# Altium PCB BatteryIot.PcbDoc (part 1 of 3)
Units mm, origin at the board's own origin, x right, y up, seen from the top; angles counter-clockwise.
Board outline 114 x 84 mm, 2 copper layers (Top Layer, Bottom Layer); 162 components, 97 nets, 548 pads, 135 vias.
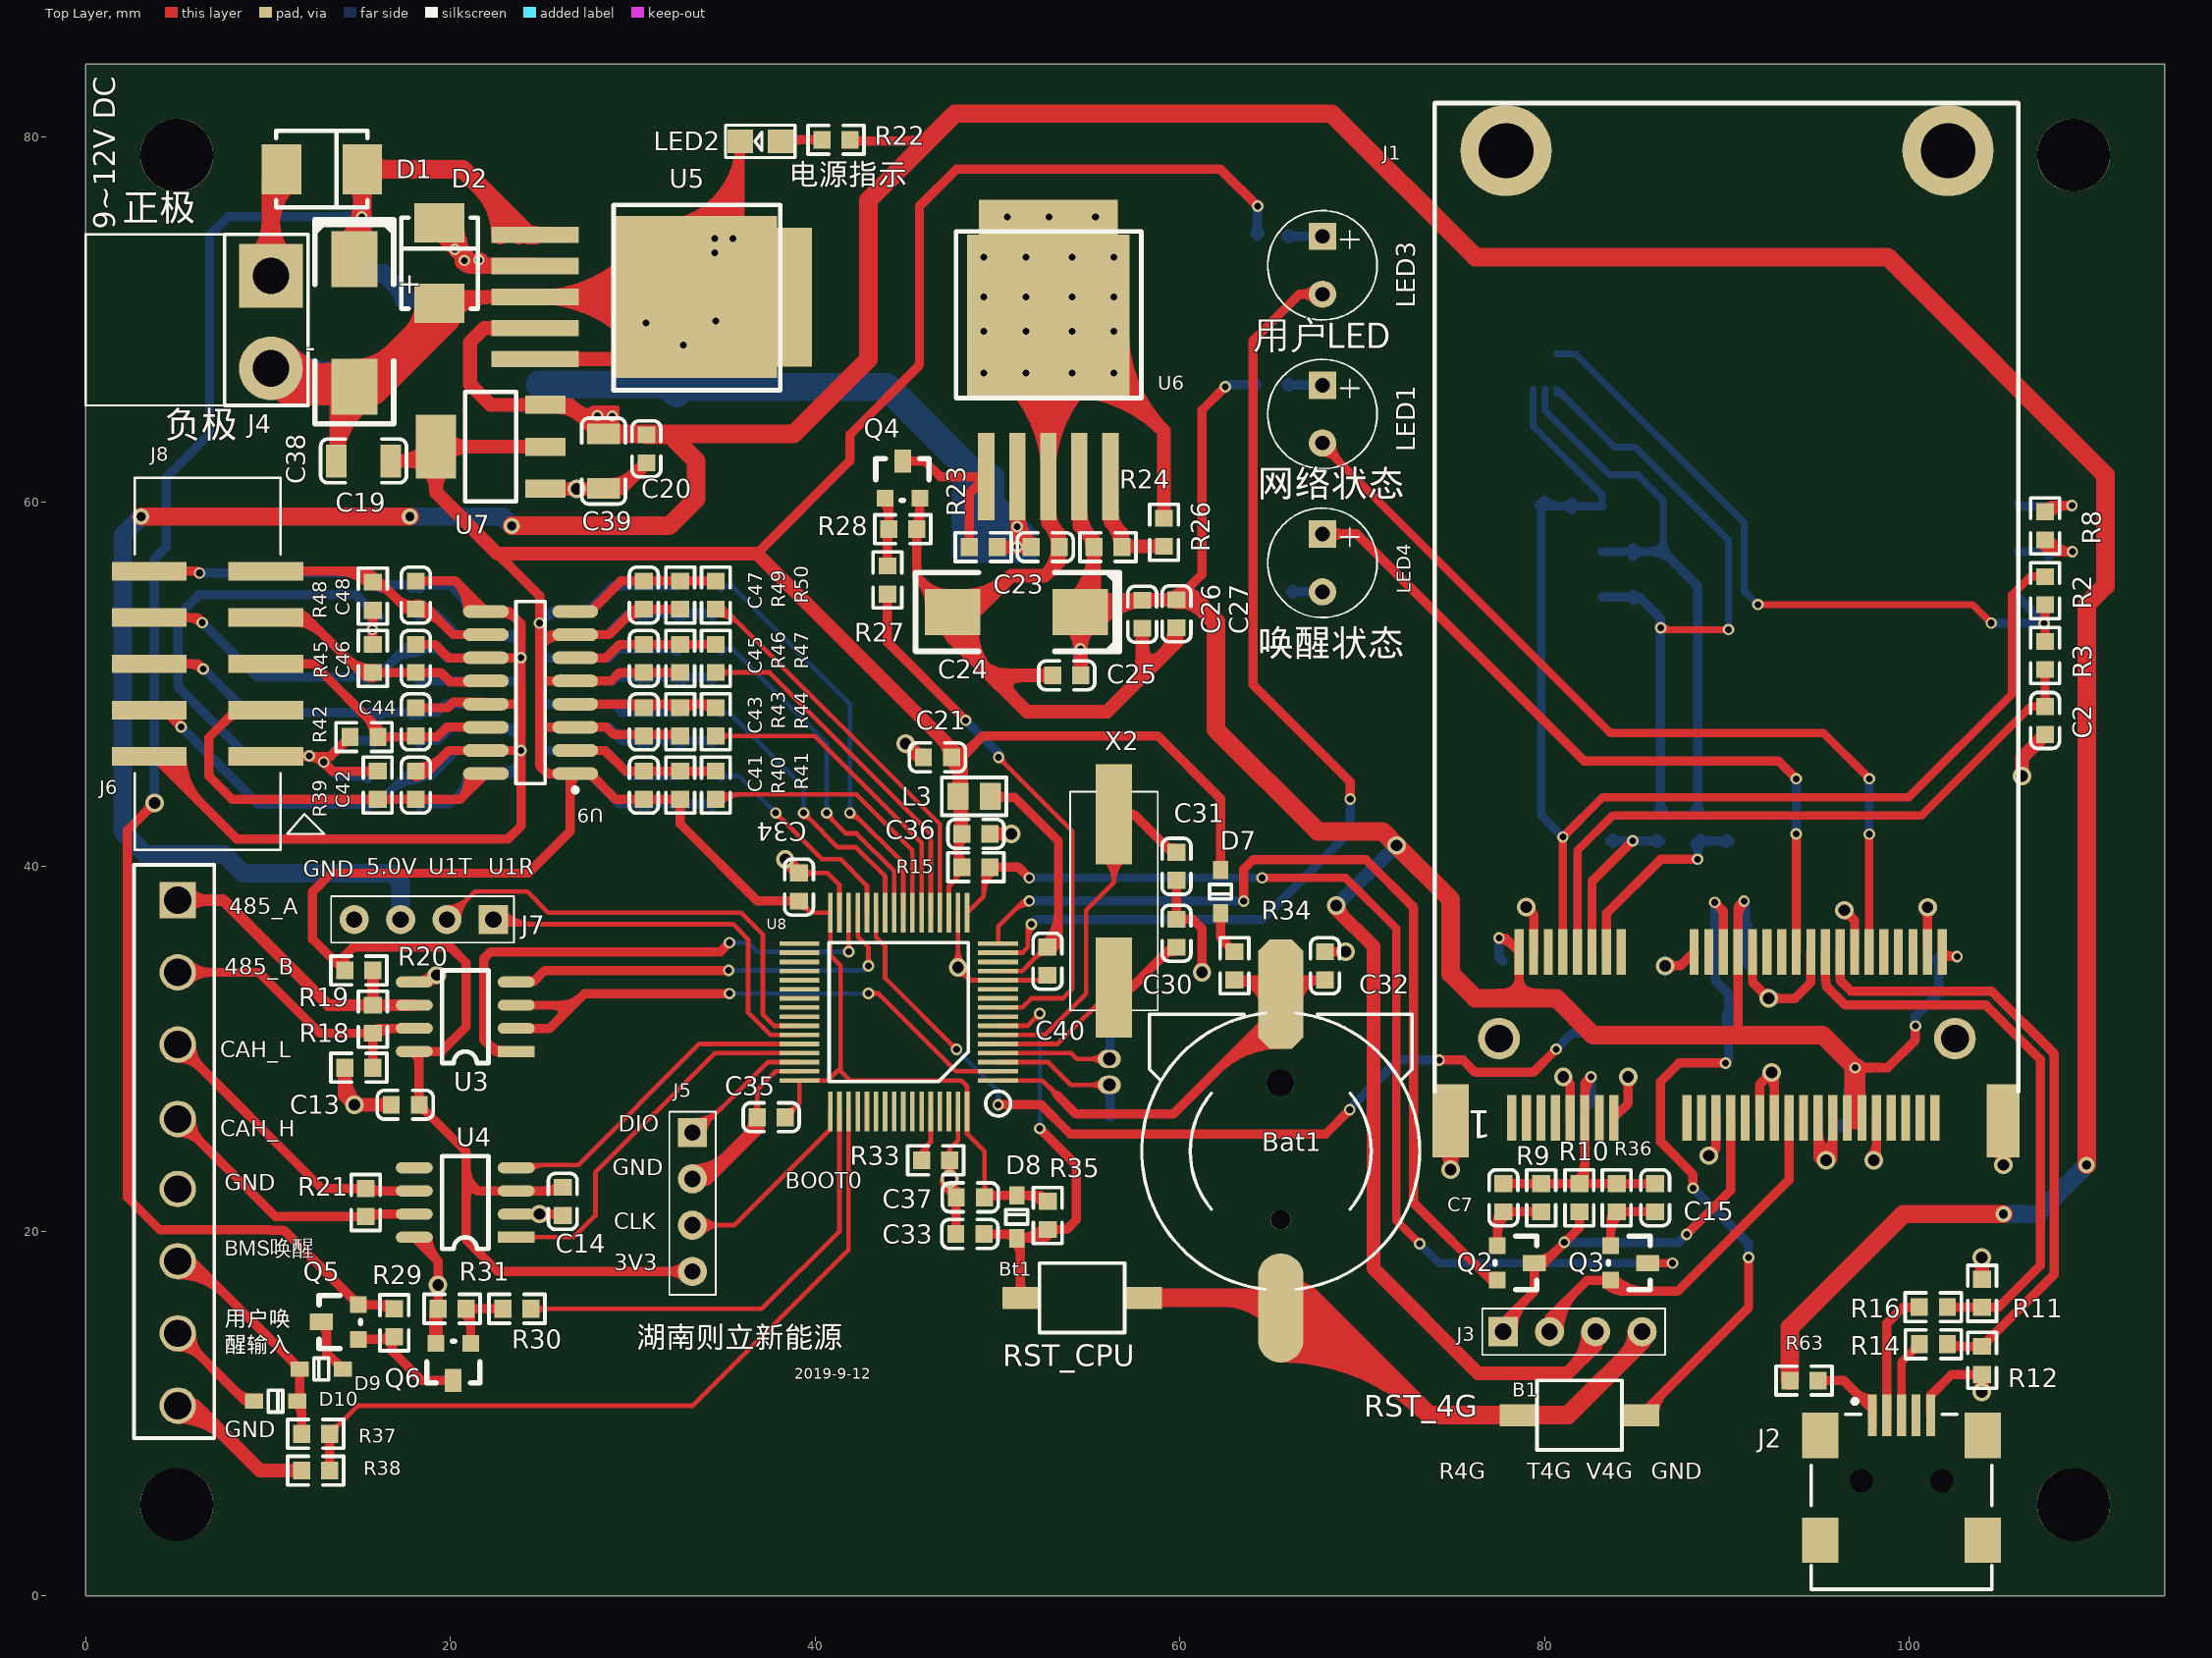
[diagram p0: Top Layer view]
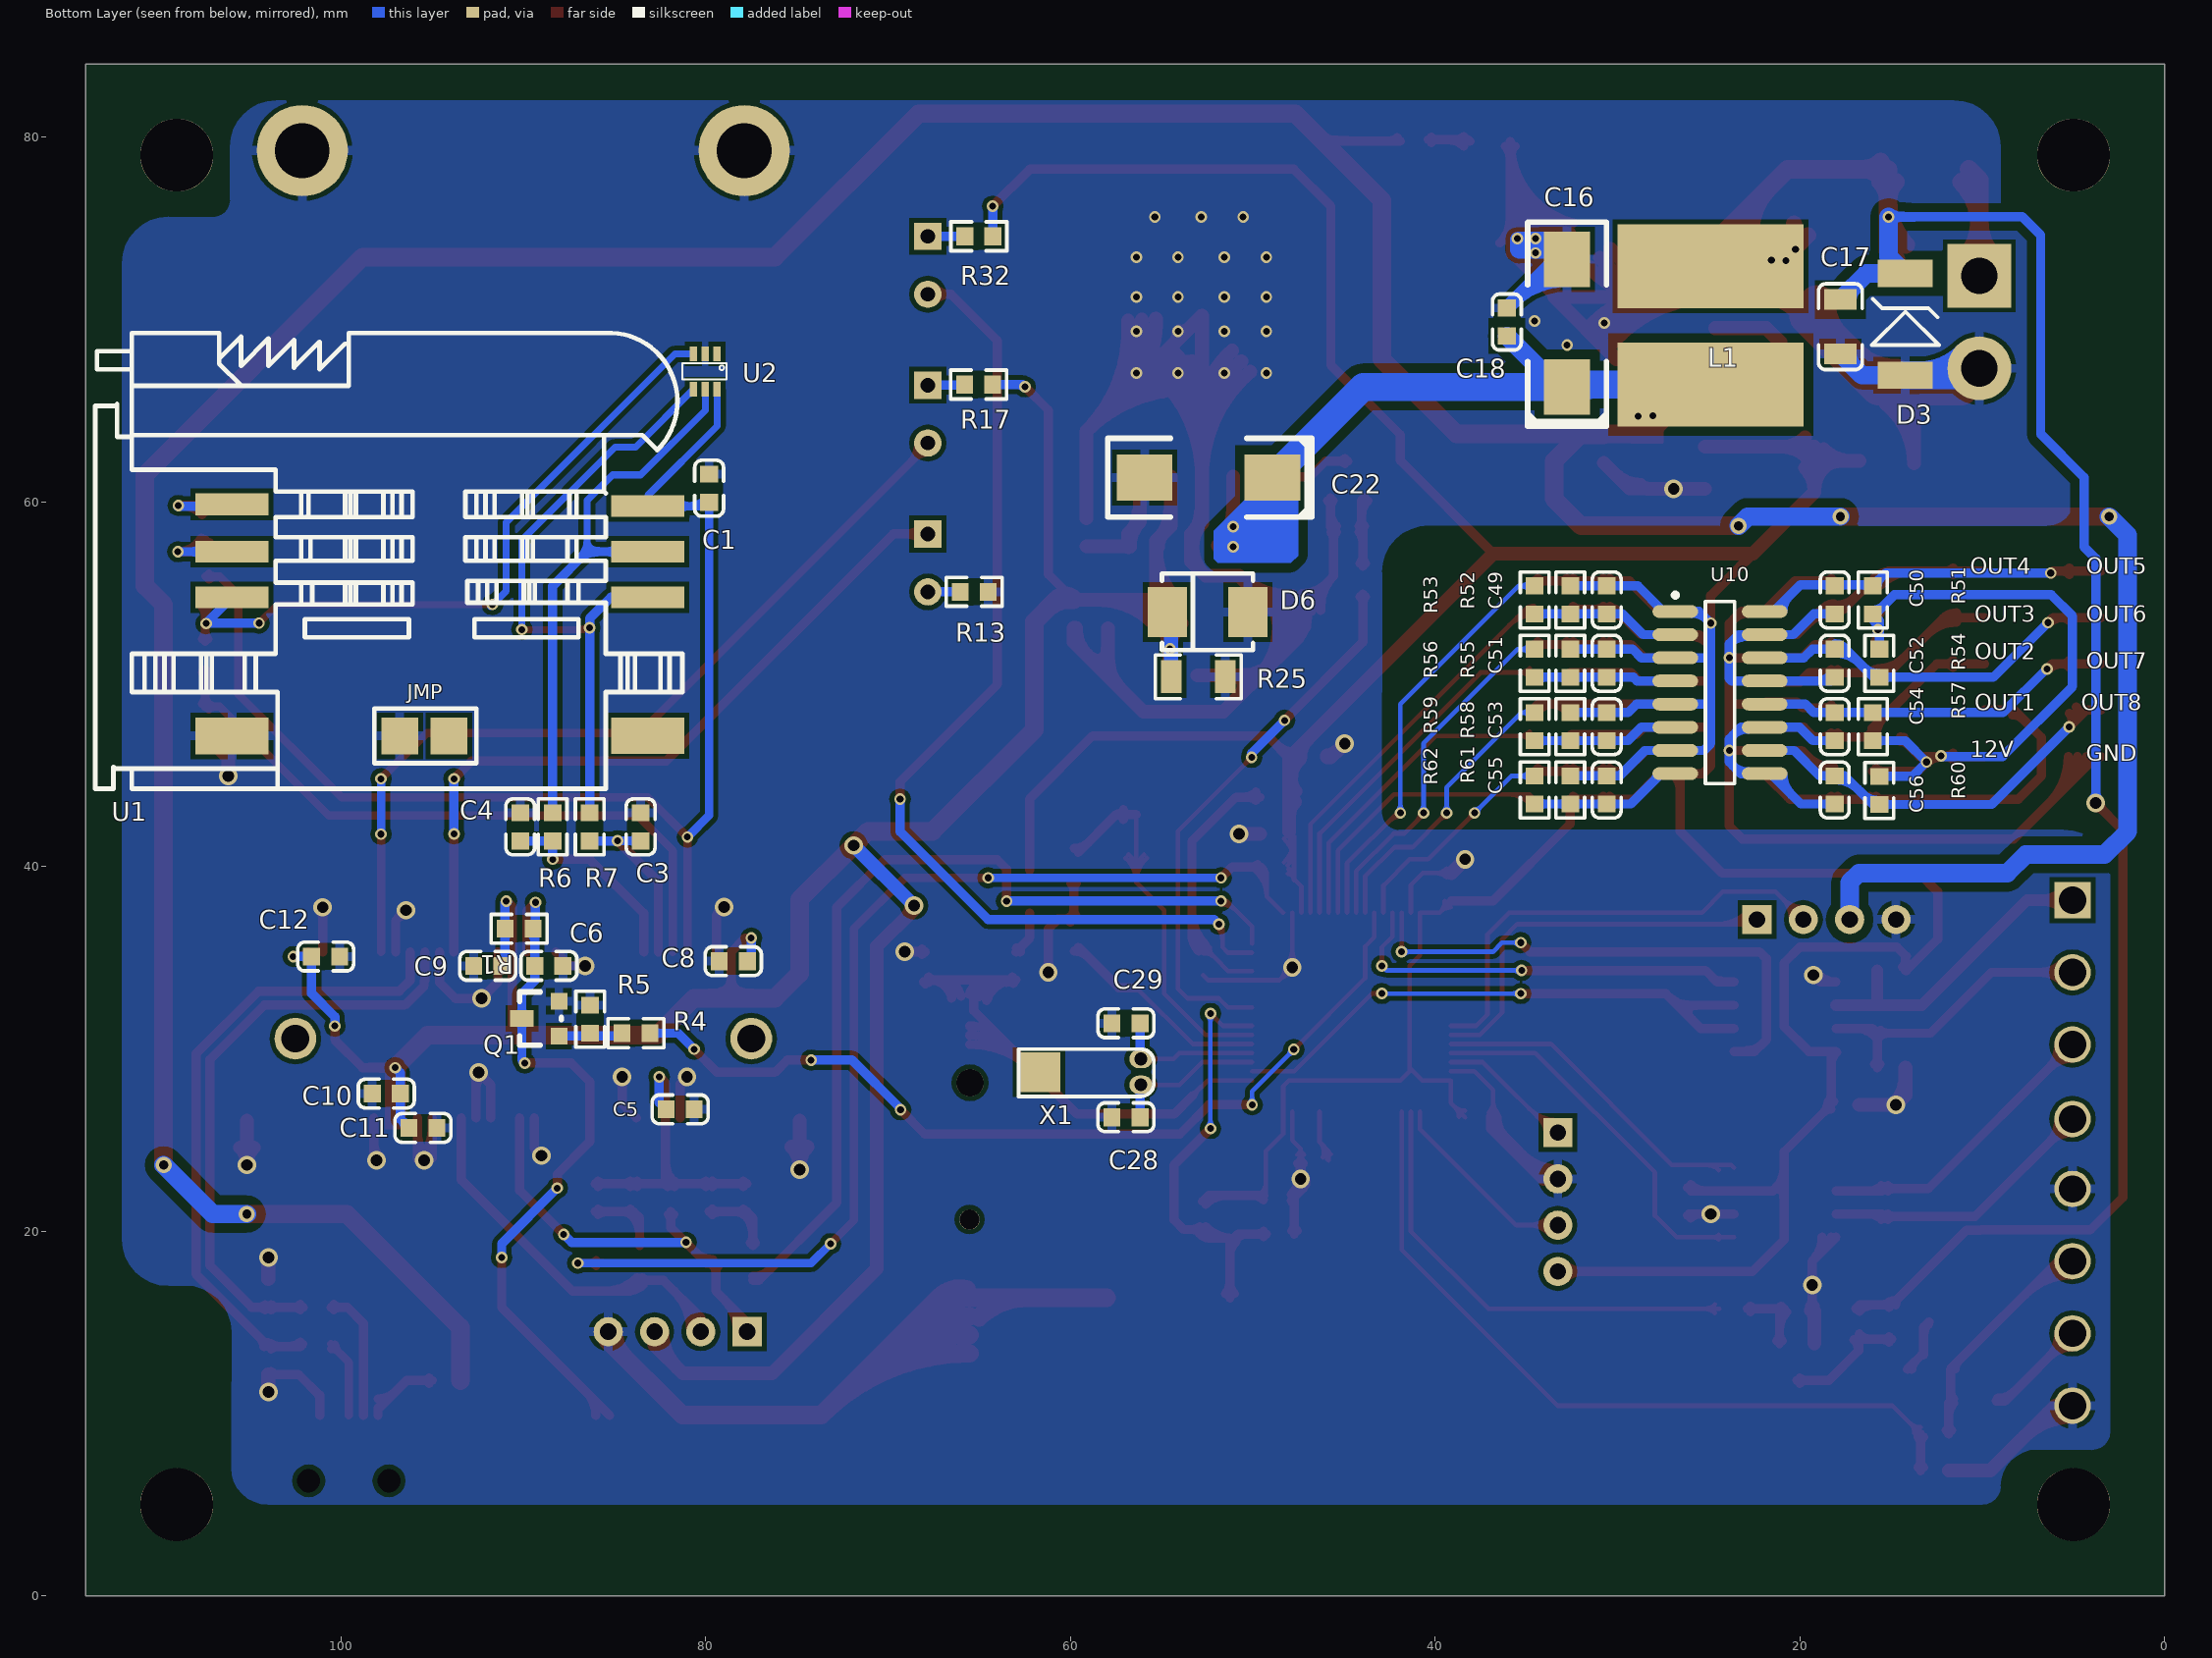
[diagram p1: Bottom Layer view, seen from below]
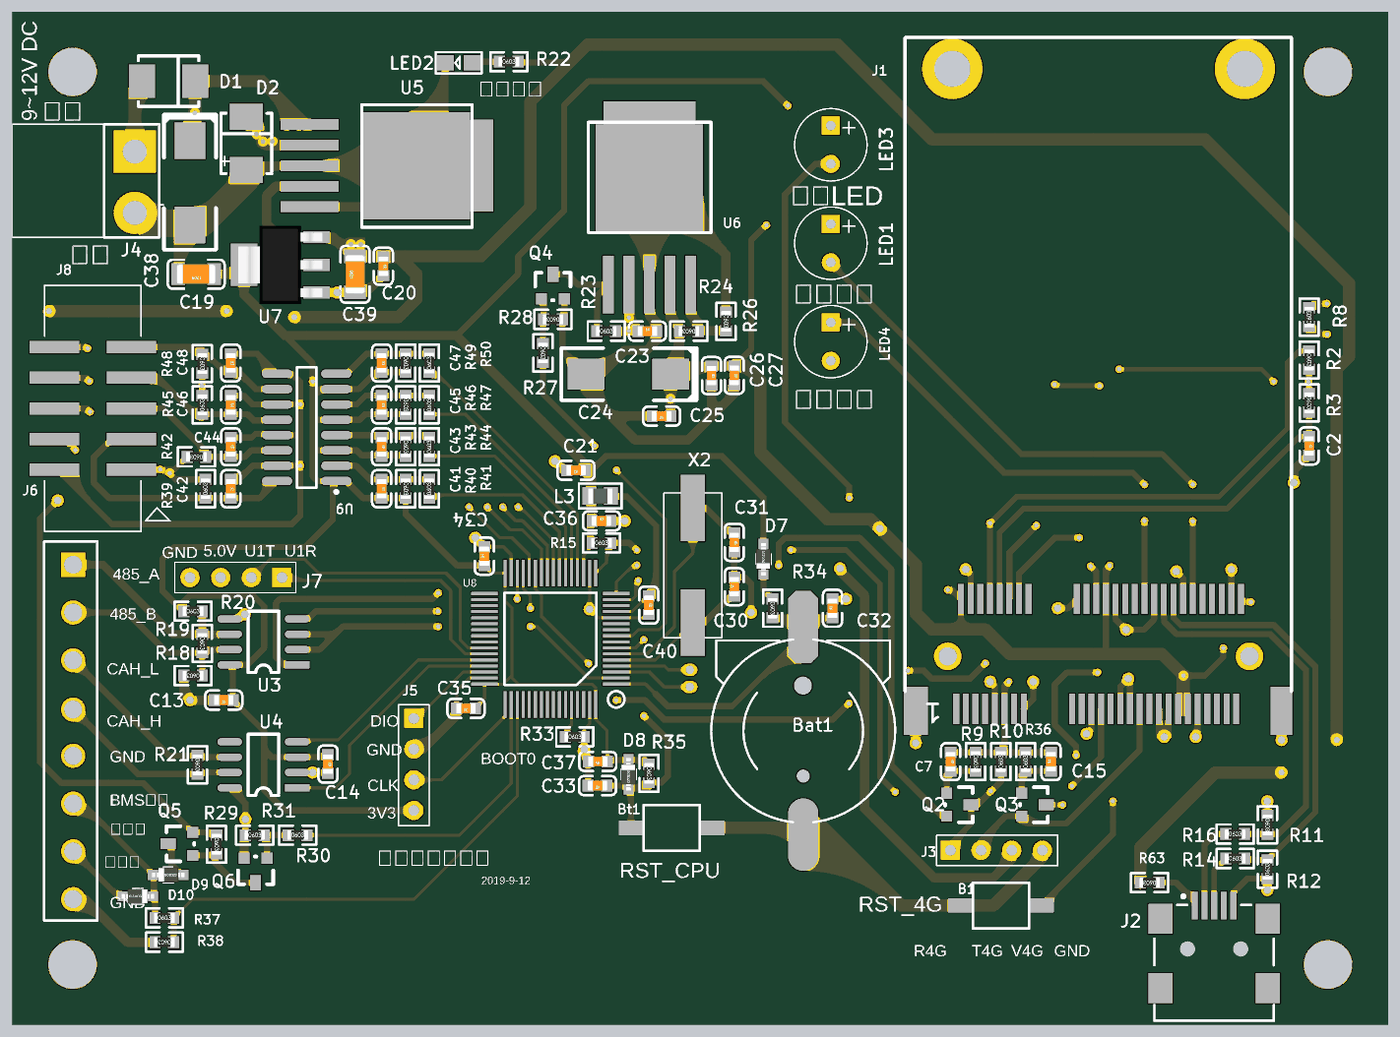
[diagram p4: 3D render of the assembled board from above, using the file's embedded part models]
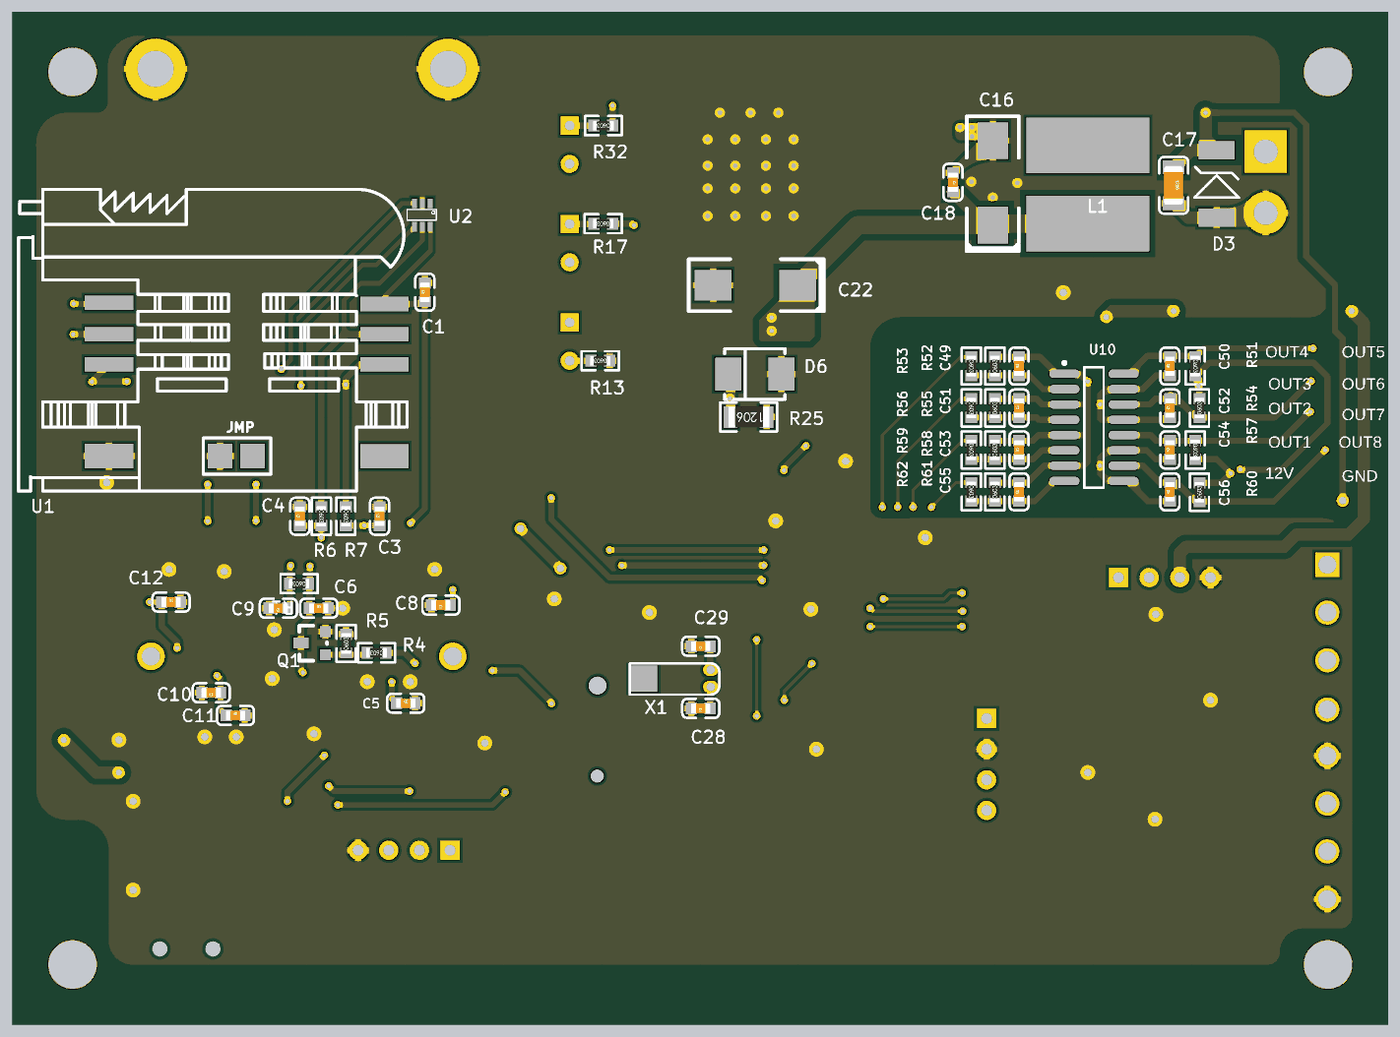
[diagram p5: 3D render of the assembled board from below, using the file's embedded part models]

## Layer stack, top to bottom
Top Solder: solder mask 0.0102, Solder Resist, Dk 3.5
Top Layer: signal copper 0.0356
Dielectric 1: dielectric 0.32, FR-4, Dk 4.8
Bottom Layer: signal copper 0.0356
Bottom Solder: solder mask 0.0102, Solder Resist, Dk 3.5

## Board outline
0,0 0,84 114,84 114,0

## Design rules (kind name [scope] priority, off if disabled: settings)
Clearance Clearance_2 [InNamedPolygon('GND') vs InNetClass('PW_IN')] p1: gap=0.508
Clearance Clearance_1 [InNet('12V') or InNet('5.0V') vs InPoly] p2: gap=0.508
Clearance [All] p3: gap=0.254
DiffPairsRouting [All] p1: maxlimit=0.254 minlimit=0.254 mostfreqgap=0.254 toplayer_minwidth=0.381 toplayer_maxwidth=0.635 toplayer_prefwidth=0.508 bottomlayer_minwidth=0.381 bottomlayer_maxwidth=0.635 bottomlayer_prefwidth=0.508 maxuncoupledlength=12.7
HoleSize [All] p1: absolutevalues=TRUE maxlimit=25.4 minlimit=0.025 maxpercent=80.000 minpercent=20.000
PolygonConnect PolygonConnect_1 [IsVia vs IsPolygon] p1: connectstyle=Direct reliefconductorwidth=0.254 reliefentries=4 polygonreliefangle="90 Angle" airgapwidth=0.254
PolygonConnect [All] p2: connectstyle=Relief reliefconductorwidth=0.508 reliefentries=4 polygonreliefangle="90 Angle" airgapwidth=0.254
RoutingVias [All] p1: holewidth=0.711 width=1.27 viastyle="Through Hole" minholewidth=0.711 minwidth=1.27 maxholewidth=0.711 maxwidth=1.27
SolderMaskExpansion [All] p1: expansion=0.102
Width [All] p1: maxlimit=20.32 minlimit=0.254 preferedwidth=0.508
27 further rules are at their usual default settings.

## Classes and differential pairs
component class PWR: C16 C17 C18 C19 C20 C21 C22 C23 C24 C25 C26 C27 C38 C39 C40 D1 D2 D3 D6 J4 L1 L3 LED2 Q4 R22 R23 R24 R25 R26 R27 R28 U5 U6 U7
component class GPIO: C41 C42 C43 C44 C45 C46 C47 C49 C50 C51 C52 C53 C54 C55 C56 D9 D10 J8 LED3 Q5 Q6 R29 R30 R31 R32 R37 R38 R39 R40 R41 R42 R43 R44 R45 R46 R47 R48 R49 R50 R51 R52 R53 R54 R55 R56 R57 R58 R59 R60 R61 R62 U9 U10
component class EC20: B1 C1 C2 C3 C4 C6 C8 C9 C10 C11 C12 J1 J2 J3 LED1 LED4 Q1 R1 R2 R3 R4 R5 R6 R7 R8 R11 R12 R13 R14 R16 R17 R63 U1 U2
component class COMM: C13 C14 R18 R19 R20 R21 U3 U4
component class TopLevelMCU: Bat1 Bt1 C28 C29 C30 C31 C32 C33 C34 C35 C36 C37 D7 D8 J5 J6 J7 R33 R34 R35 U8 X1 X2
differential pair RS: +RS_P -RS_N
differential pair CAN: +CAN_P -CAN_N
differential pair USB: +USB_P -USB_N

## Components (designator, comment, footprint, x,y, rotation, side; value= is the part's Value field where it differs from the comment)
B1 "Reset" "3*6*2.5贴片 微动开关" 81.908,9.899 r180 top
Bat1 "3v Battery" BATM 65.532,24.376 r180 top
Bt1 "Reset" "3*6*2.5贴片 微动开关" 54.635,16.332 r180 top
C1 "104" 0603_C 79.812,60.734 r90 bottom
C2 "33pF" 0603_C 107.442,47.998 r270 top
C3 "33pF" 0603_C 83.566,42.164 r90 bottom
C4 "33pF" 0603_C 90.17,42.164 r90 bottom
C5 "100nF" 0603_C 81.4,26.67 r180 bottom
C6 "104" 0603_C 88.6,34.544 r180 bottom
C7 "1nF" 0603_C 77.744,21.825 r270 top
C8 "104" 0603_C 78.486,34.798 r0 bottom
C9 "104" 0603_C 91.948,34.544 r0 bottom
C10 "104" 0603_C 97.513,27.536 r0 bottom
C11 "104" 0603_C 95.504,25.654 r180 bottom
C12 "104" 0603_C 100.838,35.052 r180 bottom
C13 "104" 0603_C 17.526,26.924 r180 top
C14 "104" 0603_C 26.162,21.623 r270 top
C15 "1nF" 0603_C 86.062,21.825 r90 top
C16 "220uF/10V" SMD-CT-7343 32.766,66.294 r90 bottom
C17 "104" 1206_C 17.78,69.596 r270 bottom
C18 "104" 0603_C 36.068,69.85 r270 bottom
C19 "10uF" 1206_C 15.24,62.23 r180 top
C20 "104" 0603_C 30.748,62.893 r270 top
C21 "104" 0603_C 46.711,45.974 r180 top
C22 "470uF/10V" SMD-CT-7343 48.927,61.317 r0 bottom
C23 "104" 0603_C 52.621,57.506 r0 top
C24 "470uF/10V" SMD-CT-7343 54.54,53.951 r180 top
C25 "104" 0603_C 53.797,50.47 r180 top
C26 "33pF" 0603_C 57.937,53.823 r270 top
C27 "10pF" 0603_C 59.817,53.848 r270 top
C28 "22p" 0603_C 56.956,26.238 r0 bottom
C29 "22p" 0603_C 56.956,31.394 r0 bottom
C30 "22p" 0603_C 59.817,36.33 r90 top
C31 "22p" 0603_C 59.817,39.997 r270 top
C32 "104" 0603_C 67.957,34.544 r90 top
C33 "104" 0603_C 48.489,19.837 r180 top
C34 "104" 0603_C 39.116,38.862 r90 top
C35 "104" 0603_C 37.592,26.238 r180 top
C36 "104" 0603_C 48.819,41.781 r0 top
C37 "104" 0603_C 48.514,21.844 r180 top
C38 "470u/25V" SMD-CT-7343 14.732,73.301 r270 top
C39 "10uF" 1206_C 28.403,62.224 r90 top
C40 "104" 0603_C 52.738,34.798 r270 top
C41 "100nF 10% 50V" 0603_C 30.607,44.45 r270 top
C42 "100nF 10% 50V" 0603_C 18.108,44.45 r270 top
C43 "100nF 10% 50V" 0603_C 30.607,47.924 r270 top
C44 "100nF 10% 50V" 0603_C 18.108,47.924 r270 top
C45 "100nF 10% 50V" 0603_C 30.607,51.398 r270 top
C46 "100nF 10% 50V" 0603_C 18.108,51.398 r270 top
C47 "100nF 10% 50V" 0603_C 30.607,54.872 r270 top
C48 "100nF 10% 50V" 0603_C 18.108,54.872 r270 top
C49 "100nF 10% 50V" 0603_C 30.593,54.61 r90 bottom
C50 "100nF 10% 50V" 0603_C 18.094,54.61 r90 bottom
C51 "100nF 10% 50V" 0603_C 30.593,51.136 r90 bottom
C52 "100nF 10% 50V" 0603_C 18.094,51.136 r90 bottom
C53 "100nF 10% 50V" 0603_C 30.593,47.662 r90 bottom
C54 "100nF 10% 50V" 0603_C 18.094,47.662 r90 bottom
C55 "100nF 10% 50V" 0603_C 30.593,44.188 r90 bottom
C56 "100nF 10% 50V" 0603_C 18.094,44.188 r90 bottom
D1 "SS34" SMB(DO-214AA)_S1 12.954,78.232 r180 top
D2 "SS34" SMB(DO-214AA)_S1 19.406,73.076 r270 top
D3 "M7" SMBJ 14.224,69.596 r90 bottom
D6 "SMBJ5.0A" SMB(DO-214AA)_S1 52.483,53.951 r180 bottom
D7 "1N4148" SOD-323 62.23,38.608 r90 top
D8 "1N4148" SOD-323 51.054,20.777 r270 top
D9 "1N4148" SOD-323 12.925,12.432 r0 top
D10 "1N4148" SOD-323 10.414,10.668 r180 top
J1 "MINI-PCIE-CON" EC20_MINIPCI 90,52.652 r0 top locked
J2 "Debug 4G" USB_MINI_NEW 101.882,6.212 r0 top
J3 "CON4" CON4(2.54) 77.724,14.478 r90 top
J4 "CON2" CON5.08-2P 10.16,72.39 r0 top
J5 "CON4" CON4(2.54) 33.274,25.4 r0 top
J6 "CON8" CON8-3.96mm 5.055,24.286 r0 top
J7 "CON4" CON4(2.54) 22.352,37.084 r270 top
J8 "CON10" XH2.54-SMD-5*2P 6.687,51.105 r90 top locked
L1 "33uH" "CD105-33uH 2A" 24.892,72.898 r180 bottom
L3 "10nH" 0805_L 48.717,43.84 r0 top
LED1 "NET" LED 67.818,64.802 r270 top
LED2 "5VPWR" SMDLED 38.1,79.756 r180 top
LED3 "5VPWR" LED 67.818,72.962 r270 top
LED4 "WAKE" LED 67.818,56.642 r270 top
Q1 "S8050" SOT-23 88.872,31.611 r90 bottom
Q2 "S8050" SOT-23 78.237,18.288 r270 top
Q3 "S8050" SOT-23 84.447,18.288 r270 top
Q4 "2N5551" SOT-23 44.754,61.017 r0 top
Q5 "AO3401A P道沟 X13A15 SOT-23" SOT-23 14.133,14.972 r90 top
Q6 "2N5551" SOT-23 20.202,13.005 r180 top
R1 "1K" 0603_R 90.23,36.576 r0 bottom
R2 "10K" 0603_R 107.442,55.118 r270 top
R3 "22R" 0603_R 107.442,51.562 r270 top
R4 "4.7K" 0603_R 83.82,30.849 r0 bottom
R5 "47K" 0603_R 86.332,31.619 r90 bottom
R6 "22R" 0603_R 88.392,42.164 r270 bottom
R7 "22R" 0603_R 86.36,42.164 r270 bottom
R8 "0R" 0603_R 107.442,58.674 r90 top
R9 "4.7k" 0603_R 79.812,21.825 r270 top
R10 "10k" 0603_R 81.908,21.825 r90 top
R11 "15K" 0603_R 103.986,16.586 r270 top
R12 "15K" 0603_R 103.986,12.903 r90 top
R13 "1k" 0603_R 65.278,55.054 r0 bottom
R14 "22R" 0603_R 101.319,13.792 r0 top
R15 "10k" 0603_R 48.819,39.954 r0 top
R16 "22R" 0603_R 101.311,15.824 r0 top
R17 "1k" 0603_R 65.032,66.421 r0 bottom
R18 "360R" 0603_R 14.986,28.956 r180 top
R19 "120R" 0603_R 15.748,31.619 r270 top
R20 "360R" 0603_R 14.986,34.29 r0 top
R21 "120R" 0603_R 15.356,21.563 r270 top
R22 "4.7K" 0603_R 41.148,79.846 r0 top
R23 "51K" 0603_R 49.217,57.506 r0 top
R24 "82K" 0603_R 56.058,57.506 r180 top
R25 "470R" 1206_R 52.991,50.395 r0 bottom
R26 "47K" 0603_R 59.131,58.318 r270 top
R27 "4.7K" 0603_R 43.967,55.702 r270 top
R28 "47K" 0603_R 44.803,58.485 r180 top
R29 "5.1K" 0603_R 16.927,14.972 r270 top
R30 "4.7K" 0603_R 23.65,15.734 r0 top
R31 "47K" 0603_R 20.094,15.734 r0 top
R32 "1k" 0603_R 65.024,74.549 r0 bottom
R33 "10K" 0603_R 46.608,23.876 r0 top
R34 "1K" 0603_R 62.992,34.544 r270 top
R35 "10K" 0603_R 52.756,20.853 r270 top
R36 "4.7k" 0603_R 83.954,21.825 r90 top
R37 "8k" 0603_R 12.609,8.876 r0 top
R38 "3.3k" 0603_R 12.609,6.858 r180 top
R39 "3.3KΩ  ±5%" 0603_R 16.016,44.45 r90 top
R40 "2KΩ ±5%" 0603_R 32.604,44.45 r270 top
R41 "700Ω ±10%" 0603_R 34.558,44.45 r90 top
R42 "3.3KΩ  ±5%" 0603_R 15.265,47.092 r180 top
R43 "2KΩ ±5%" 0603_R 32.604,47.924 r270 top
R44 "700Ω ±10%" 0603_R 34.558,47.924 r90 top
R45 "3.3KΩ  ±5%" 0603_R 15.748,51.398 r90 top
R46 "2KΩ ±5%" 0603_R 32.604,51.398 r270 top
R47 "700Ω ±10%" 0603_R 34.558,51.398 r90 top
R48 "3.3KΩ  ±5%" 0603_R 15.748,54.813 r270 top
R49 "2KΩ ±5%" 0603_R 32.604,54.872 r270 top
R50 "700Ω ±10%" 0603_R 34.558,54.872 r90 top
R51 "3.3KΩ  ±5%" 0603_R 16.002,54.61 r270 bottom
R52 "2KΩ ±5%" 0603_R 32.59,54.61 r90 bottom
R53 "700Ω ±10%" 0603_R 34.544,54.61 r270 bottom
R54 "3.3KΩ  ±5%" 0603_R 15.646,51.136 r90 bottom
R55 "2KΩ ±5%" 0603_R 32.59,51.136 r90 bottom
R56 "700Ω ±10%" 0603_R 34.544,51.136 r270 bottom
R57 "3.3KΩ  ±5%" 0603_R 16.002,47.662 r270 bottom
R58 "2KΩ ±5%" 0603_R 32.59,47.662 r90 bottom
R59 "700Ω ±10%" 0603_R 34.544,47.662 r270 bottom
R60 "3.3KΩ  ±5%" 0603_R 15.646,44.163 r90 bottom
R61 "2KΩ ±5%" 0603_R 32.59,44.188 r90 bottom
R62 "700Ω ±10%" 0603_R 34.544,44.188 r270 bottom
R63 "0R" 0603_R 94.226,11.797 r180 top
U1 "SIM" SIM_BIG_POPUP 94.574,53.504 r90 bottom locked
U2 "SMF05C" SOT363 79.372,68.106 r0 bottom
U3 "SP3485" SOP8 20.817,31.75 r180 top
U4 "SN65HVD230DR" SO-8 23.611,19.658 r180 top
U5 "LM2596" TO-263-5-NEW 29.588,72.223 r180 top
U6 "MIC29302" TO-263-5-NEW 51.787,66.318 r270 top
U7 "AMS1117-3.3" SOT-223 22.209,63.009 r0 top
U8 "STM32F103RET6" LQFP64 50.038,28.258 r180 top locked
U9 "TLP291-4" SOP16_M 24.398,49.53 r180 top
U10 "TLP291-4" SOP16_M 24.384,49.53 r180 bottom
X1 "32.768kHz" XTAL32 56.134,28.016 r0 bottom
X2 "8MHz" Crystal_SMD 56.388,38.1 r90 top

## Footprints (in the part's own frame and the unit in brackets; to place one, negate y for a bottom-side part, rotate by r counter-clockwise, add the part's x,y. Pads: shape width x height; smd on the part's side, far side on the other; paste and mask are expansions set on the pad)
"3*6*2.5贴片 微动开关" [mm]
  rect 2x1.2 smd mask+0.05: 1(-3.375,0) 2(3.375,0)
  silkscreen extent -2.33,-1.9 2.32,1.9
0603_C [mm]
  rect 0.93x0.98 smd: 1(-0.77,0) 2(0.77,0)
  silkscreen extent -1.53,-0.79 1.54,0.79, body extent -0.8,-0.4 0.8,0.4, height 0.3
0603_R [mm]
  rect 0.93x0.98 smd: 1(-0.77,0) 2(0.77,0)
  silkscreen extent -1.53,-0.79 1.54,0.79, body extent -0.85,-0.4 0.85,0.4, height 0.56
0805_L [mm]
  rect 1.16x1.47 smd: 1(-0.89,0) 2(0.89,0)
  silkscreen extent -1.77,-1.04 1.77,1.03, body extent -1,-0.64 1,0.64, height 0.6
1206_C [mm]
  rect 1.13x1.8 smd: 1(-1.49,0) 2(1.49,0)
  silkscreen extent -2.36,-1.2 2.35,1.2, body extent -1.6,-0.81 1.6,0.79, height 1
1206_R [mm]
  rect 1.13x1.8 smd: 1(-1.49,0) 2(1.49,0)
  silkscreen extent -2.36,-1.2 2.35,1.2, body extent -1.7,-0.86 1.65,0.87, height 0.85
BATM [mm]
  round 1.1 hole 1.1 unplated: 0(0,3.748)
  round 1.5 hole 1.5 unplated: 0(0.025,-3.752)
  oct 2.5x6 smd: 1(0,-8.602)
  oval 2.5x6 smd: 2(0,8.598)
  silkscreen extent -7.62,-7.58 7.62,7.57
"CD105-33uH 2A" [mm]
  rect 10.2x4.6 smd: 1(0,0) 2(0,-6.477)
CON4(2.54) [mm]
  rect 1.6x1.6 hole 0.9 mask+0.05: 1(0,0)
  round 1.6 hole 0.9 mask+0.05: 2(0,-2.54)
  round 1.6 hole 0.9: 3(0,-5.08) 4(0,-7.62)
  silkscreen extent -1.27,-8.89 1.27,1.14
CON5.08-2P [mm]
  rect 3.5x3.5 hole 2: 1(0,0)
  round 3.5 hole 2: 2(0,-5.08)
  silkscreen extent -10.16,-7.11 2.03,2.26
CON8-3.96mm [mm]
  rect 2x2 hole 1.5: 1(0,13.86)
  round 2 hole 1.5: 2(0,9.9) 3(0,5.94) 4(0,1.86) 5(0,-1.98) 6(0,-5.94) 7(0,-9.9) 8(0,-13.86)
  silkscreen extent -2.4,-15.64 2,15.79
Crystal_SMD [mm]
  rect 5.5x2 smd: 1(-4.75,0) 2(4.75,0)
  silkscreen extent -6,-2.4 6,2.4
EC20_MINIPCI [mm]
  round 2.286 hole 1.524: 0(-12.5,-22.1) 0(12.5,-22.1)
  rect 0.5x2.5 smd: 1(-11.8,-26.45) 2(-11.4,-17.35) 3(-11,-26.45) 4(-10.6,-17.35) 5(-10.2,-26.45) 6(-9.8,-17.35) 7(-9.4,-26.45) 8(-9,-17.35) 9(-8.6,-26.45) 10(-8.2,-17.35) 11(-7.8,-26.45) 12(-7.4,-17.35) 13(-7,-26.45) 14(-6.6,-17.35) 15(-6.2,-26.45) 16(-5.8,-17.35) 17(-2.2,-26.45) 18(-1.8,-17.35) 19(-1.4,-26.45) 20(-1,-17.35) 21(-0.6,-26.45) 22(-0.2,-17.35) 23(0.2,-26.45) 24(0.6,-17.35) 25(1,-26.45) 26(1.4,-17.35) 27(1.8,-26.45) 28(2.2,-17.35) 29(2.6,-26.45) 30(3,-17.35) 31(3.4,-26.45) 32(3.8,-17.35) 33(4.2,-26.45) 34(4.6,-17.35) 35(5,-26.45) 36(5.4,-17.35) 37(5.8,-26.45) 38(6.2,-17.35) 39(6.6,-26.45) 40(7,-17.35) 41(7.4,-26.45) 42(7.8,-17.35) 43(8.2,-26.45) 44(8.6,-17.35) 45(9,-26.45) 46(9.4,-17.35) 47(9.8,-26.45) 48(10.2,-17.35) 49(10.6,-26.45) 50(11,-17.35) 51(11.4,-26.45) 52(11.8,-17.35)
  round 5 hole 3: 53(12.12,26.6) 54(-12.116,26.6)
  rect 1.8x4 smd: 55(15.15,-26.6)
  rect 2x4 smd: 56(-15.15,-26.6)
  silkscreen extent -16.04,-25.01 15.97,29.21
LED [mm]
  rect 1.5x1.5 hole 0.8: 1(-1.587,0)
  round 1.5 hole 0.8: 2(1.587,0)
  silkscreen extent -3,-3 3,3
LQFP64 [mm]
  rect 2.2x0.254 smd: 1(0,0) 2(0,-0.5) 3(0,-1) 4(0,-1.5) 5(0,-2) 6(0,-2.5) 7(0,-3) 8(0,-3.5) 9(0,-4) 10(0,-4.5) 11(0,-5) 12(0,-5.5) 13(0,-6) 14(0,-6.5) 15(0,-7) 16(0,-7.5) 33(10.9,-7.5) 34(10.9,-7) 35(10.9,-6.5) 36(10.9,-6) 37(10.9,-5.5) 38(10.9,-5) 39(10.9,-4.5) 40(10.9,-4) 41(10.9,-3.5) 42(10.9,-3) 43(10.9,-2.5) 44(10.9,-2) 45(10.9,-1.5) 46(10.9,-1) 47(10.9,-0.5) 48(10.9,0)
  rect 0.254x2.2 smd: 17(1.7,-9.2) 18(2.2,-9.2) 19(2.7,-9.2) 20(3.2,-9.2) 21(3.7,-9.2) 22(4.2,-9.2) 23(4.7,-9.2) 24(5.2,-9.2) 25(5.7,-9.2) 26(6.2,-9.2) 27(6.7,-9.2) 28(7.2,-9.2) 29(7.7,-9.2) 30(8.2,-9.2) 31(8.7,-9.2) 32(9.2,-9.2) 49(9.2,1.7) 50(8.7,1.7) 51(8.2,1.7) 52(7.7,1.7) 53(7.2,1.7) 54(6.7,1.7) 55(6.2,1.7) 56(5.7,1.7) 57(5.2,1.7) 58(4.7,1.7) 59(4.2,1.7) 60(3.7,1.7) 61(3.2,1.7) 62(2.7,1.7) 63(2.2,1.7) 64(1.7,1.7)
  silkscreen extent -0.68,-7.56 9.26,1.95
SIM_BIG_POPUP [mm]
  rect 1.2x4 smd: 1(6.25,-11.4) 2(3.75,-11.4) 3(1.25,-11.4) 4(6.35,11.4) 5(3.75,11.4) 6(1.25,11.4)
  rect 2.032x2.032 smd: 7(-6.35,-0.5) 8(-6.35,2.2)
  rect 2x4 smd: 7(-6.35,-11.4)
  rect 2.032x4 smd: 8(-6.35,11.4)
  silkscreen extent -9.25,-13.3 15.75,18.9
SMB(DO-214AA)_S1 [mm]
  rect 2.159x2.743 smd: 1(2.21,0) 2(-2.21,0)
  silkscreen extent -2.5,-2.1 2.5,2.1
SMBJ [mm]
  rect 1.5x3 smd: 1(-2.667,0) 2(2.921,0)
  silkscreen extent -1.02,-1.85 1.52,1.83
SMD-CT-7343 [mil]
  rect 120x100 smd: 1(0,0) 2(275.59,0)
  silkscreen extent -85,-85 356,85
SMDLED [mm]
  rect 1.4x1.27 smd: 1(0.001,-0.002) 2(2.211,-0.002)
  silkscreen extent -0.8,-0.89 3.01,0.89
SO-8 [mil]
  rect 80x24 smd: 1(0,0)
  oval 80x24 smd: 2(0,-50) 3(0,-100) 4(0,-150) 5(220,-150) 6(220,-100) 7(220,-50) 8(220,0)
  silkscreen extent 60,-175 160,25
SOD-323 [mm]
  rect 1x0.83 smd: 1(1.18,0) 2(-1.18,0)
  silkscreen extent -0.4,-0.6 0.4,0.6, body extent -1.35,-0.62 1.35,0.63, height 1.1
SOP8 [mil]
  rect 80x24 smd: 1(-110,75)
  oval 80x24 smd: 2(-110,25) 3(-110,-25) 4(-110,-75) 5(110,-75) 6(110,-25) 7(110,25) 8(110,75)
  silkscreen extent -50,-100 50,100
SOP16_M [mm]
  oval 2.5x0.7 smd: 1(-2.45,4.445) 2(-2.45,3.175) 3(-2.45,1.905) 4(-2.45,0.635) 5(-2.45,-0.635) 6(-2.45,-1.905) 7(-2.45,-3.175) 8(-2.45,-4.445) 9(2.45,-4.445) 10(2.45,-3.175) 11(2.45,-1.905) 12(2.45,-0.635) 13(2.45,0.635) 14(2.45,1.905) 15(2.45,3.175) 16(2.45,4.445)
  silkscreen extent -2.57,-5 0.8,5.47, body extent -2,-5 2,5, height 1.75
SOT363 [mm]
  rect 0.4x0.8 smd: 1(0,0) 2(0.65,0) 3(1.3,0) 4(1.3,1.94) 5(0.65,1.94) 6(0,1.94)
  silkscreen extent -0.51,0.51 1.91,1.4
SOT-23 [mil]
  rect 36x36 smd: 1(-36.06,-32.44) 2(38.94,-32.44)
  rect 36x50 smd: 3(1.94,47.56)
  silkscreen extent -56,-37 59,53
SOT-223 [mm]
  rect 2.2x1 smd: 1(3,-2.3) 2(3,0) 3(3,2.3)
  rect 2.2x3.5 smd: 2(-3,0)
  silkscreen extent -1.4,-3 1.4,3, body extent -3.49,-3.24 3.49,3.24, height 1.64
TO-263-5-NEW [mm]
  rect 4.8x0.9 smd: 1(4.95,-2.402) 2(4.95,-0.701) 3(4.95,1.001) 4(4.95,2.703) 5(4.95,4.405)
  rect 2.5x7.62 smd: 3(-9,1)
  rect 8.89x8.89 smd: 3(-3.889,1)
  silkscreen extent -8.51,-4.05 0.64,6.11
USB_MINI_NEW [mm]
  rect 0.5x2.3 smd: 1(-3.914,3.687) 2(-3.114,3.687) 3(-2.314,3.687) 4(-1.514,3.687) 5(-0.714,3.687)
  rect 2x2.5 smd: 6(2.136,2.587) 7(2.136,-3.167) 8(-6.764,2.587) 9(-6.764,-3.167)
  round 0.6 hole 1.27 unplated: MH1(-0.114,0.087) MH2(-4.514,0.087)
  silkscreen extent -7.26,-5.86 2.64,4.57
XH2.54-SMD-5*2P [mm]
  rect 1.02x4.1 smd: 1(-5.08,-3.194) 2(-2.54,-3.194) 3(0,-3.194) 4(2.54,-3.194) 5(5.08,-3.194) 6(5.08,3.194) 7(2.54,3.194) 8(0,3.194) 9(-2.54,3.194) 10(-5.08,3.194)
  silkscreen extent -10.2,-4 10.2,4
XTAL32 [mil]
  oval 50x40 hole 28: 1(0,0) 2(0,-56)
  rect 92.13x86 smd: ""(220,-27)
  silkscreen extent -28,-77 264,25

## Part data
B1 Bt1: library part "PUSH BUTTON"
Bat1: library part MS621FE
C1 C2 C3 C4 C5 C6 C7 C8 C9 C10 C11 C12 C13 C14 C15 C17 C18 C19 C20 C21 C23 C25 C26 C27 C32 C33 C34 C35 C36 C37 C39 C40: library part C
C16 C22 C24 C38: library part CAP
C28 C29 C30 C31: library part CAP, "Capacitor"
C41 C42 C43 C44 C45 C46 C47 C48 C49 C50 C51 C52 C53 C54 C55 C56: library part "0603 1nF (102) 10% 50V", "贴片电容"
D3 D6: library part SMBJ, "TVS"
D7 D8: library part D
D9 D10: library part SS34
J2: library part USB5
L1 L3: library part L
LED1 LED2 LED3 LED4: library part LED2, "Typical RED, GREEN, YELLOW, AMBER GaAs LED"
Q1 Q2 Q3 Q4 Q6: library part NPN
Q5: "MOS(场效应管)"
R1 R4 R5 R9 R10 R15 R33 R34 R35 R36: library part R
R2 R3 R6 R7 R8 R11 R12 R13 R14 R16 R17 R18 R19 R20 R21 R22 R23 R24 R25 R26 R27 R28 R29 R30 R31 R32 R37 R38 R63: library part RES
R39 R42 R45 R48 R51 R54 R57 R60: library part "0603 3.3KΩ (3301) 1%", "贴片电阻"
R40 R43 R46 R49 R52 R55 R58 R61: library part "0603 2KΩ (2001) 1%", "贴片电阻"
R41 R44 R47 R50 R53 R56 R59 R62: library part "0603 5.6KΩ (5601) 1%", "贴片电阻"
U1: library part SIM-抽屉式插卡
U3: library part SP3485E
U4: library part TJA1050
U6: library part MIC29302WU
U7: library part AMS1117
U8: library part STM32F103RDT6
U9 U10: library part PS2801, "东芝四通道光耦 SOP16"
X1 X2: library part Crystal2

## Free pads (board coordinates)
  round 4 hole 4: 0(5,5) 0(5,79) 0(109,5) 0(109,79)

## Via types
v1: diameter 0.635, hole 0.381, Top Layer to Bottom Layer, 99 vias
v2: diameter 1.016, hole 0.635, Top Layer to Bottom Layer, 31 vias
v3: diameter 0.889, hole 0.508, Top Layer to Bottom Layer, 5 vias

## Nets (pads, with @x,y where several pads share a name; then routed paths per layer and width w, separated by ;. In a path a pad name is that pad's centre, name@x,y a point inside that pad or via, vN(x,y) a via of type N, cw(c..) or ccw(c..) an arc to the next point about the centre after c; other vN are vias at no path point)
3.3V: C13.1 C14.1 C19.1 C21.1 C34.1 C35.1 C36.1 C37.1 C41.2 C43.2 C45.2 C47.2 C49.2 C51.2 C53.2 C55.2 D7.1 D8.2 J5.4 L3.1 R15.1 R20.1 R32.1 R35.1 R40.2 R43.2 R46.2 R49.2 R52.2 R55.2 R58.2 R61.2 U3.8 U4.3 U7.2 U8.19 U8.32 U8.48 U8.64 U9.1 U9.3 U9.5 U9.7 U10.1 U10.3 U10.5 U10.7 | length 359.6
  Top Layer w0.254: C35.1@38.362,26.238 39.138,27.014 39.138,28.25 40.696,28.25 41.402,28.956 ; C35.1@38.362,26.601 ccw(c38.362,27.478) 38.982,26.858 ; C35.1@38.7,26.263 cw(c39.456,26.263) 38.921,26.798 ; C34.1@39.116,38.092 39.75,37.458 U8.32@40.838,37.458 40.838,35.108 41.402,34.544 41.402,28.956 ; C34.1@39.141,37.754 cw(c39.141,36.998) 39.675,37.533 ; C34.1@39.479,38.092 ccw(c40.355,38.092) 39.736,37.472 ; U8.19@47.338,37.458 47.338,38.914 47.744,39.32 C36.1@47.744,41.656 ; 47.744,39.248 cw(c48.089,39.248) R15.1@48.069,39.592 ; R15.1@47.744,39.517 cw(c48.073,39.517) R15.1@48.054,39.845 ; R15.1@47.744,40.204 cw(c49.601,40.204) C36.1@48.288,41.517 ; 47.744,40.817 cw(c48.987,40.817) C36.1@48.108,41.696 ; 47.744,40.918 ccw(c48.987,40.918) R15.1@48.108,40.039 ; C36.1@47.744,41.531 ccw(c49.601,41.531) R15.1@48.288,40.218 ; C37.1@49.284,21.844 49.284,24.376 48.338,25.322 U8.64@48.338,26.558 48.338,27.938 48.026,28.25 41.91,28.25 41.402,28.758 41.402,28.956 ; 49.284,22.685 ccw(c50.1,22.685) C37.1@49.523,22.108
  Top Layer w0.508: 13.718,34.732 ccw(c14.216,35.23) R20.1@14.216,34.526 ; R20.1@14.067,34.464 ccw(c13.707,34.824) 14.216,34.824 ccw(c14.725,34.824) R20.1@14.365,34.464 ; U3.8@17.987,29.809 cw(c17.28,29.102) 18.28,29.102 ; C13.1@18.147,27.098 ccw(c17.825,27.42) 18.28,27.42 ; 18.28,27.497 ccw(c18.844,27.497) C13.1@18.445,27.098 ; C13.1@18.296,26.688 cw(c18.296,26.138) C13.1@18.685,26.527 ; C13.1@18.507,26.899 ccw(c18.975,26.899) C13.1@18.644,26.568 ; 22.581,57.15 24.892,54.839 v1(24.892,53.34) 24.892,52.07 ; 25.066,52.244 cw(c25.948,51.361) U9.7@25.948,52.609 ; 25.156,22.198 ccw(c25.156,23.375) C14.1@25.988,22.543 ; C14.1@26.162,22.393 25.967,22.198 U4.3@23.611,22.198 21.49,22.198 20.864,22.824 ; 26.563,44.165 cw(c27.768,44.165) U9.1@26.916,45.017 ; U9.1@27.844,45.085 ccw(c28.286,45.085) 27.973,44.772 ; 29.397,53.4 cw(c30.582,52.215) C47.2@30.582,53.891 ; C47.2@30.428,53.959 ccw(c30.099,53.654) 30.099,54.102 ; C47.2@30.428,54.245 cw(c30.099,54.55) 30.099,54.102 ; C41.2@30.433,43.531 ccw(c30.073,43.171) 30.073,43.68 ccw(c30.073,44.189) C41.2@30.433,43.829 ; C41.2@30.781,43.531 cw(c31.142,43.171) 31.142,43.68 cw(c31.142,44.189) C41.2@30.781,43.829 ; C47.2@30.781,53.953 cw(c31.142,53.593) 31.142,54.102 cw(c31.142,54.611) C47.2@30.781,54.251 ; 31.891,47.228 cw(c31.891,46.466) R43.2@32.43,47.005 ; R40.2@32.43,43.531 ccw(c32.069,43.171) 32.069,43.68 ccw(c32.069,44.189) R40.2@32.43,43.829 ; R49.2@32.43,53.953 ccw(c32.069,53.593) 32.069,54.102 ccw(c32.069,54.611) R49.2@32.43,54.251 ; R40.2@32.455,43.531 cw(c32.094,43.171) 32.604,43.171 cw(c33.113,43.171) R40.2@32.753,43.531 ; R43.2@32.604,47.154 32.53,47.228 28.956,47.228 28.559,47.625 U9.3@26.848,47.625 25.019,47.625 24.892,47.498 ; R46.2@32.604,50.628 29.27,50.628 28.807,50.165 U9.5@26.848,50.165 24.943,50.165 24.892,50.114 ; R49.2@32.604,54.102 30.099,54.102 ; J5.4@32.888,17.394 ccw(c31.956,16.462) 31.956,17.78 ccw(c31.956,19.098) J5.4@32.888,18.166 ; J5.4@33.274,17.78 22.606,17.78 20.864,19.522 20.864,22.824 ; 36.805,57.15 41.91,62.255 41.91,63.678 45.72,67.488 45.72,76.2 47.752,78.232 62.23,78.232 v1(64.262,76.2) ; C34.1@39.116,38.092 36.838,38.092 32.604,42.326 R40.2@32.604,43.68 C41.2@30.607,43.68 29.066,43.68 27.661,45.085 U9.1@26.848,45.085 ; C21.1@47.481,46.21 ccw(c47.481,48.048) 48.78,46.748 ; 48.006,45.974 49.186,47.154 58.789,47.154 62.23,43.713 D7.1@62.23,39.788 ; C37.1@49.397,21.957 D8.2@51.054,21.957 52.422,21.957 R35.1@52.756,21.623 ; C37.1@49.433,21.72 cw(c50.006,21.147) 50.006,21.957 ; D8.2@51.416,21.957 cw(c51.416,20.308) R35.1@52.582,21.474 ; 20.864,22.824 20.864,24.348 18.28,26.932 18.28,29.588 U3.8@18.023,29.845 19.507,29.845 20.864,31.202 20.864,34.714 20.01,35.568 14.677,35.568 14.161,35.052 14.216,34.996 R20.1@14.216,34.29 14.161,34.29 12.446,36.005 12.446,38.608 13.462,39.624 24.269,39.624 26.563,41.918 26.563,44.8 U9.1@26.848,45.085 ; 24.892,47.498 24.892,45.504 25.311,45.085 U9.1@26.848,45.085 ; 24.892,47.498 24.892,50.114 ; 24.892,50.114 24.892,52.07 ; 24.892,52.07 25.527,52.705 U9.7@26.848,52.705 28.702,52.705 30.099,54.102
  Top Layer w0.762: C19.1@16.73,62.23 18.43,62.23 U7.2@19.209,63.009 ; C19.1@17.162,62.23 ccw(c17.162,64.406) U7.2@18.701,62.867 ; 17.785,62.23 cw(c17.785,60.935) 18.701,61.851 cw(c17.473,60.623) 19.209,60.623 cw(c20.945,60.623) U7.2@19.718,61.851 ; U7.2@19.718,62.501 cw(c20.945,61.273) 20.945,63.009 cw(c20.945,64.745) U7.2@19.718,63.517 ; U7.2@25.209,63.009 U7.2@19.209,63.009 ; 47.001,46.953 cw(c46.047,45.999) C21.1@47.397,45.999 ; C21.1@47.421,45.89 cw(c46.009,44.478) L3.1@48.006,44.478 ; L3.1@47.677,44.125 ccw(c46.969,44.736) 47.872,44.978 ; L3.1@47.686,43.545 cw(c46.915,42.773) 48.006,42.773 ; L3.1@47.686,44.136 ccw(c46.915,44.907) 48.006,44.907 ; C21.1@47.744,46.211 36.805,57.15 22.581,57.15 19.209,60.521 U7.2@19.209,63.009 ; C36.1@48.006,41.918 48.006,45.974
  Bottom Layer w0.508: v1@24.892,53.332 24.892,51.562 ; v1@25.089,53.529 cw(c25.934,52.684) U10.1@25.934,53.879 ; 25.535,53.975 U10.1@26.834,53.975 27.483,53.975 28.888,55.38 R52.2@32.59,55.38 ; 32.028,51.918 cw(c32.028,51.369) R55.2@32.416,51.757 ; 32.084,51.918 ccw(c32.084,52.387) R55.2@32.416,52.055 ; R61.2@32.59,44.958 29.896,44.958 28.499,46.355 U10.7@26.834,46.355 25.273,46.355 24.892,46.736 24.892,48.768 ; R58.2@32.59,48.432 29.419,48.432 28.956,48.895 U10.5@26.834,48.895 25.019,48.895 24.892,48.768 ; R55.2@32.59,51.906 32.578,51.918 29.185,51.918 28.702,51.435 U10.3@26.834,51.435 25.019,51.435 24.892,51.562 ; R32.1@64.105,74.723 ccw(c63.745,75.083) 64.254,75.083 ccw(c64.763,75.083) R32.1@64.403,74.723 ; R32.1@64.254,74.549 64.254,76.192 v1(64.262,76.2) ; 24.892,48.768 24.892,51.562
3.3VA: C40.1 L3.2 U8.13 | length 20.2
  Top Layer w0.254: U8.13@50.038,34.258 51.352,34.258 52.07,34.976 ; 52.173,35.078 ccw(c51.683,35.568) C40.1@52.375,35.568 ; C40.1@52.705,35.23 ccw(c52.684,34.361) 52.07,34.976 ; C40.1@52.738,35.568 52.387,35.217 52.311,35.217 52.07,34.976
  Top Layer w0.508: L3.2@49.607,43.79 50.934,43.79 53.34,41.383 53.34,36.17 C40.1@52.738,35.568 ; L3.2@49.838,43.61 cw(c50.272,43.176) 50.272,43.79 ; L3.2@49.838,44.071 ccw(c50.517,44.75) 50.517,43.79 ; C40.1@52.614,35.717 ccw(c50.862,37.469) 53.34,37.469 ; C40.1@52.763,35.779 ccw(c52.763,36.228) C40.1@53.081,35.911 ; C40.1@52.973,35.358 ccw(c52.088,36.243) 53.34,36.243 ; C40.1@52.974,35.568 cw(c53.544,35.568) C40.1@53.141,35.971
5.0V: C16.1 C18.2 C20.1 C22.1 C23.1 C39.2 J7.3 L1.2 R22.2 R23.2 R63.2 U5.4 U6.2 U7.3 | length 303.4
  Top Layer w0.508: R22.2@41.918,79.78 46.172,79.78 ; R22.2@42.067,79.97 ccw(c42.525,80.428) 42.525,79.78
  Top Layer w0.762: U5.4@24.638,69.52 21.844,69.52 21.082,68.758 21.082,66.436 22.209,65.309 U7.3@25.209,65.309 26.563,65.309 C39.2@28.209,63.663 ; U7.3@25.809,65.19 cw(c25.809,63.083) 27.299,64.573 ; 26.614,65.257 ccw(c28.067,66.71) v1@28.067,64.656 ; C39.2@27.691,64.181 cw(c27.223,63.714) C39.2@27.884,63.714 ; v1@28.009,64.745 ccw(c28.895,64.349) C39.2@28.209,63.663 ; C39.2@28.868,63.844 ccw(c29.306,64.281) 29.306,63.663 ; C20.1@30.748,63.663 C39.2@28.209,63.663 ; R23.2@49.987,57.506 51.105,57.506 cw(c51.105,57.524) v1(51.086,57.524) ; U6.2@51.086,59.58 ccw(c53.9,59.58) C23.1@51.91,57.59 ; U6.2@51.086,61.367 v1(51.086,57.524) ; C23.1@51.851,57.506 ccw(c51.832,57.506) 51.832,57.524 v1(51.086,57.524)
  Top Layer w1.016: v3(3.048,59.182) v3(17.78,59.182) ; v3(23.368,58.674) 31.996,58.674 33.477,60.155 33.477,62.23 32.044,63.663 C20.1@30.748,63.663 ; C39.2@28.403,63.714 38.822,63.714 42.926,67.818 42.926,76.534 46.172,79.78 47.672,81.28 68.326,81.28 76.2,73.406 98.806,73.406 110.744,61.468 110.744,55.372 109.728,54.356 v3(109.728,23.622) ; R63.2@93.456,11.797 93.456,14.716 99.668,20.928 v3(105.156,20.928)
  Bottom Layer w1.016: v3(3.048,59.182) 2.032,58.166 2.032,41.91 3.302,40.64 7.62,40.64 8.636,39.624 16.764,39.624 17.272,39.116 J7.3@17.272,37.084 ; v3(17.78,59.182) 22.86,59.182 v3(23.368,58.674) ; C16.1@33.282,66.294 C18.2@36.068,69.08 ; v3(105.156,20.928) 107.034,20.928 v3(109.728,23.622)
  Bottom Layer w1.524: L1.2@24.892,66.421 32.639,66.421 C16.1@32.766,66.294 33.282,66.294 43.95,66.294 C22.1@48.927,61.317 ; 31.233,66.421 cw(c31.233,64.761) C16.1@32.407,65.935
  other v1: 51.086,58.623 28.88,64.694 28.067,64.719
12V: C17.1 C38.1 D1.2 D3.2 Q5.2 R29.1 U5.1 | length 122
  Top Layer w0.508: v2@3.524,43.466 cw(c2.911,43.466) 3.345,43.032 cw(c3.778,42.599) v2@3.778,43.212 ; v2(3.778,43.466) 2.286,41.973 2.286,21.844 4.064,20.066 10.057,20.066 10.092,20.031 10.887,20.031 Q5.2@14.957,15.961 16.708,15.961 R29.1@16.927,15.742 ; Q5.2@14.754,15.961 ccw(c14.263,15.961) 14.61,16.308 ccw(c14.957,16.655) Q5.2@14.957,16.164 ; Q5.2@15.101,15.817 cw(c15.448,15.47) 15.448,15.961 cw(c15.448,16.452) Q5.2@15.101,16.105 ; 15.864,15.961 cw(c15.864,14.704) R29.1@16.753,15.593
  Top Layer w1.016: C38.1@14.193,74.094 ccw(c11.849,76.437) 15.164,76.437 ; C38.1@14.732,73.301 15.164,73.733 D1.2@15.164,78.232 20.676,78.232 24.282,74.625 U5.1@24.638,74.625 ; D1.2@14.76,77.536 cw(c13.784,76.56) 15.164,76.56 cw(c16.544,76.56) D1.2@15.568,77.536 ; D1.2@15.568,77.828 cw(c16.544,76.852) 16.544,78.232 cw(c16.544,79.612) D1.2@15.568,78.636 ; 21.66,77.248 cw(c19.037,74.625) U5.1@22.746,74.625 ; 23.394,75.514 cw(c22.506,74.625) U5.1@23.762,74.625
  Bottom Layer w0.508: v2@3.599,43.645 ccw(c3.165,44.079) 3.778,44.079 ccw(c4.391,44.079) v2@3.958,43.645 ; v2(3.778,43.466) 3.778,56.88 4.422,57.524 4.422,61.332 6.799,63.709 6.799,74.617 7.798,75.616 v1(15.138,75.616)
  Bottom Layer w1.016: D3.2@14.803,72.688 ccw(c13.993,73.498) 15.138,73.498 ; D3.2@14.812,72.697 ccw(c14.149,73.431) 15.138,73.431 ; v1(15.138,75.616) 15.138,73.431 ; 17.111,71.755 cw(c16.442,71.086) C17.1@17.388,71.086 ; C17.1@17.78,71.086 16.349,72.517 D3.2@14.224,72.517 15.138,73.431
12V_OUT: J8.1 R39.2 R42.2 R45.2 R48.2 R51.2 R54.2 R57.2 R60.2 | length 56.6
  Top Layer w0.508: J8.1@9.881,46.025 12.725,46.025 ; J8.1@11.602,45.844 cw(c12.039,45.407) 12.039,46.025 cw(c12.039,46.643) J8.1@11.602,46.206 ; J8.1@11.903,46.061 ccw(c12.016,46.486) v1@12.236,46.105 ; v1@12.166,46.025 cw(c12.166,44.831) v1@13.011,45.675 ; v1@12.268,45.987 cw(c12.268,44.791) v1@13.114,45.636 ; v1@13.119,45.719 cw(c13.429,45.715) 13.429,46.025 ; R42.2@14.093,46.689 cw(c14.495,46.286) R42.2@14.495,46.856 ; R42.2@14.153,46.749 ccw(c13.835,47.067) R42.2@14.284,47.067 ; R42.2@14.495,47.092 13.429,46.025 ; R45.2@15.599,52.317 ccw(c15.239,52.677) 15.748,52.677 ccw(c16.257,52.677) R45.2@15.897,52.317 ; R48.2@15.599,53.894 cw(c15.239,53.534) 15.748,53.534 cw(c16.257,53.534) R48.2@15.897,53.894 ; v1@15.67,52.95 cw(c15.305,52.71) R45.2@15.726,52.597 ; R45.2@15.748,52.168 R48.2@15.748,54.043 ; R39.2@15.842,45.071 ccw(c15.481,44.711) 15.481,45.22 ccw(c15.481,45.729) R39.2@15.842,45.369 ; R39.2@16.016,45.22 13.53,45.22 12.725,46.025 ; 12.725,46.025 13.429,46.025
  Bottom Layer w0.508: v1(12.268,46.05) 12.243,46.025 8.89,46.025 5.055,49.86 5.055,53.721 6.223,54.889 14.819,54.889 15.869,53.84 R51.2@16.002,53.84 ; 15.432,54.277 ccw(c15.977,54.822) R51.2@15.977,54.051 ; R60.2@15.472,44.783 ccw(c15.112,44.423) 15.112,44.933 ccw(c15.112,45.442) R60.2@15.472,45.082 ; R54.2@15.497,52.055 ccw(c15.137,52.415) 15.646,52.415 ccw(c16.156,52.415) R54.2@15.796,52.055 ; R60.2@15.646,44.933 13.843,44.933 v1(13.056,45.72) 14.228,46.892 R57.2@16.002,46.892 ; R54.2@15.646,51.906 15.646,53.484 R51.2@16.002,53.84 ; 15.646,52.532 cw(c17.285,52.532) R51.2@16.126,53.691 ; 15.646,52.647 cw(c16.06,52.647) v1@15.768,52.939 ; 15.646,53.322 ccw(c16.06,53.322) v1@15.768,53.029 ; v1@15.784,53.002 cw(c16.607,53.235) R51.2@16.002,53.84 ; R57.2@15.828,46.743 ccw(c15.468,46.383) 15.468,46.892 ccw(c15.468,47.401) R57.2@15.828,47.041
  other v1: 15.723,52.984
BOOT0: R33.1 U8.60 | length 5
  Top Layer w0.254: R33.1@45.722,24.219 ccw(c45.662,24.384) 45.838,24.384 ; R33.1@45.838,23.876 45.838,24.384 ; R33.1@45.916,23.931 cw(c46.51,24.158) 46.061,24.607 ; R33.1@45.954,24.219 cw(c46.014,24.384) 45.838,24.384 ; R33.1@46.154,24.022 cw(c46.911,24.311) 46.338,24.884 ; U8.60@46.338,26.558 46.338,24.884 ; 45.838,24.384 46.338,24.884
CAN_N: J6.3 R21.1 U4.6 | length 20.7
  Top Layer w0.508: J6.3@5.055,29.48 cw(c5.055,27.679) 6.328,28.952 cw(c7.602,30.226) J6.3@5.801,30.226 ; J6.3@5.055,30.226 12.948,22.333 R21.1@15.356,22.333 15.491,22.198 U4.6@18.023,22.198 ; R21.1@15.182,22.184 ccw(c14.822,21.824) 14.822,22.333 ccw(c14.822,22.842) R21.1@15.182,22.482 ; R21.1@15.53,22.482 ccw(c16.216,23.168) 16.216,22.198
CAN_P: J6.4 R21.2 U4.7 | length 19.6
  Top Layer w0.508: J6.4@5.055,25.4 cw(c5.055,23.599) 6.328,24.872 cw(c7.602,26.146) J6.4@5.801,26.146 ; J6.4@5.055,26.146 10.408,20.793 R21.2@15.356,20.793 15.491,20.928 U4.7@18.023,20.928 ; R21.2@15.182,20.644 ccw(c14.822,20.284) 14.822,20.793 ccw(c14.822,21.302) R21.2@15.182,20.942 ; R21.2@15.53,20.644 cw(c16.216,19.958) 16.216,20.928
CAN_RX: U4.4 U8.44 | length 19.1
  Top Layer w0.254: U4.4@23.611,23.468 23.765,23.622 27.018,23.622 33.654,30.258 U8.44@39.138,30.258 ; U4.4@24.448,23.342 cw(c25.123,22.667) 25.123,23.622
CAN_TX: U4.1 U8.45 | length 21.8
  Top Layer w0.254: U4.1@23.611,19.658 26.77,19.658 27.953,20.841 27.953,23.206 34.505,29.758 U8.45@39.138,29.758 ; U4.1@24.448,19.532 cw(c24.752,19.229) 24.752,19.658 cw(c24.752,20.087) U4.1@24.448,19.784
CPU_WK: R30.2 U8.50 | length 26.5
  Top Layer w0.254: R30.2@24.42,15.734 37.078,15.734 41.338,19.994 U8.50@41.338,26.558 ; R30.2@24.659,15.495 cw(c25.236,14.918) 25.236,15.734 cw(c25.236,16.55) R30.2@24.659,15.973
EC20_RST: B1.1 C6.1 J1.22 Q1.3 R1.1 | length 44
  Top Layer w0.508: B1.1@85.283,9.899 91.186,15.802 v1(91.186,18.542) ; B1.1@86.029,9.899 cw(c87.83,9.899) 86.556,11.172 ; v1(88.138,22.352) 88.138,23.114 86.36,24.892 86.36,28.194 87.376,29.21 v1@89.8,29.21 ; v1(89.332,38.024) 89.8,37.556 J1.22@89.8,35.302
  Bottom Layer w0.508: v1(88.138,22.352) 91.186,19.304 v1(91.186,18.542) ; C6.1@89.221,34.37 cw(c88.861,34.01) 89.37,34.01 cw(c89.879,34.01) C6.1@89.519,34.37 ; C6.1@89.221,34.718 ccw(c88.861,35.078) 89.37,35.078 ccw(c89.879,35.078) C6.1@89.519,34.718 ; v1(89.332,38.024) 89.332,36.704 R1.1@89.46,36.576 89.37,36.486 C6.1@89.37,34.544 89.37,33.73 90.08,33.02 Q1.3@90.08,31.66 90.08,29.374 v1(89.916,29.21) ; 89.37,35.824 cw(c90.187,35.824) R1.1@89.609,36.402 ; Q1.3@89.936,31.516 cw(c89.589,31.169) 90.08,31.169 cw(c90.571,31.169) Q1.3@90.224,31.516 ; Q1.3@89.936,31.804 ccw(c89.589,32.151) 90.08,32.151 ccw(c90.571,32.151) Q1.3@90.224,31.804